# Altium PCB pcbEncoders.PcbDoc
Units mm, origin at the board's own origin, x right, y up, seen from the top; angles counter-clockwise.
Board outline 31.7 x 28.75 mm, 2 copper layers (Top Layer, Bottom Layer); 5 components, 47 nets, 26 pads, 0 vias.
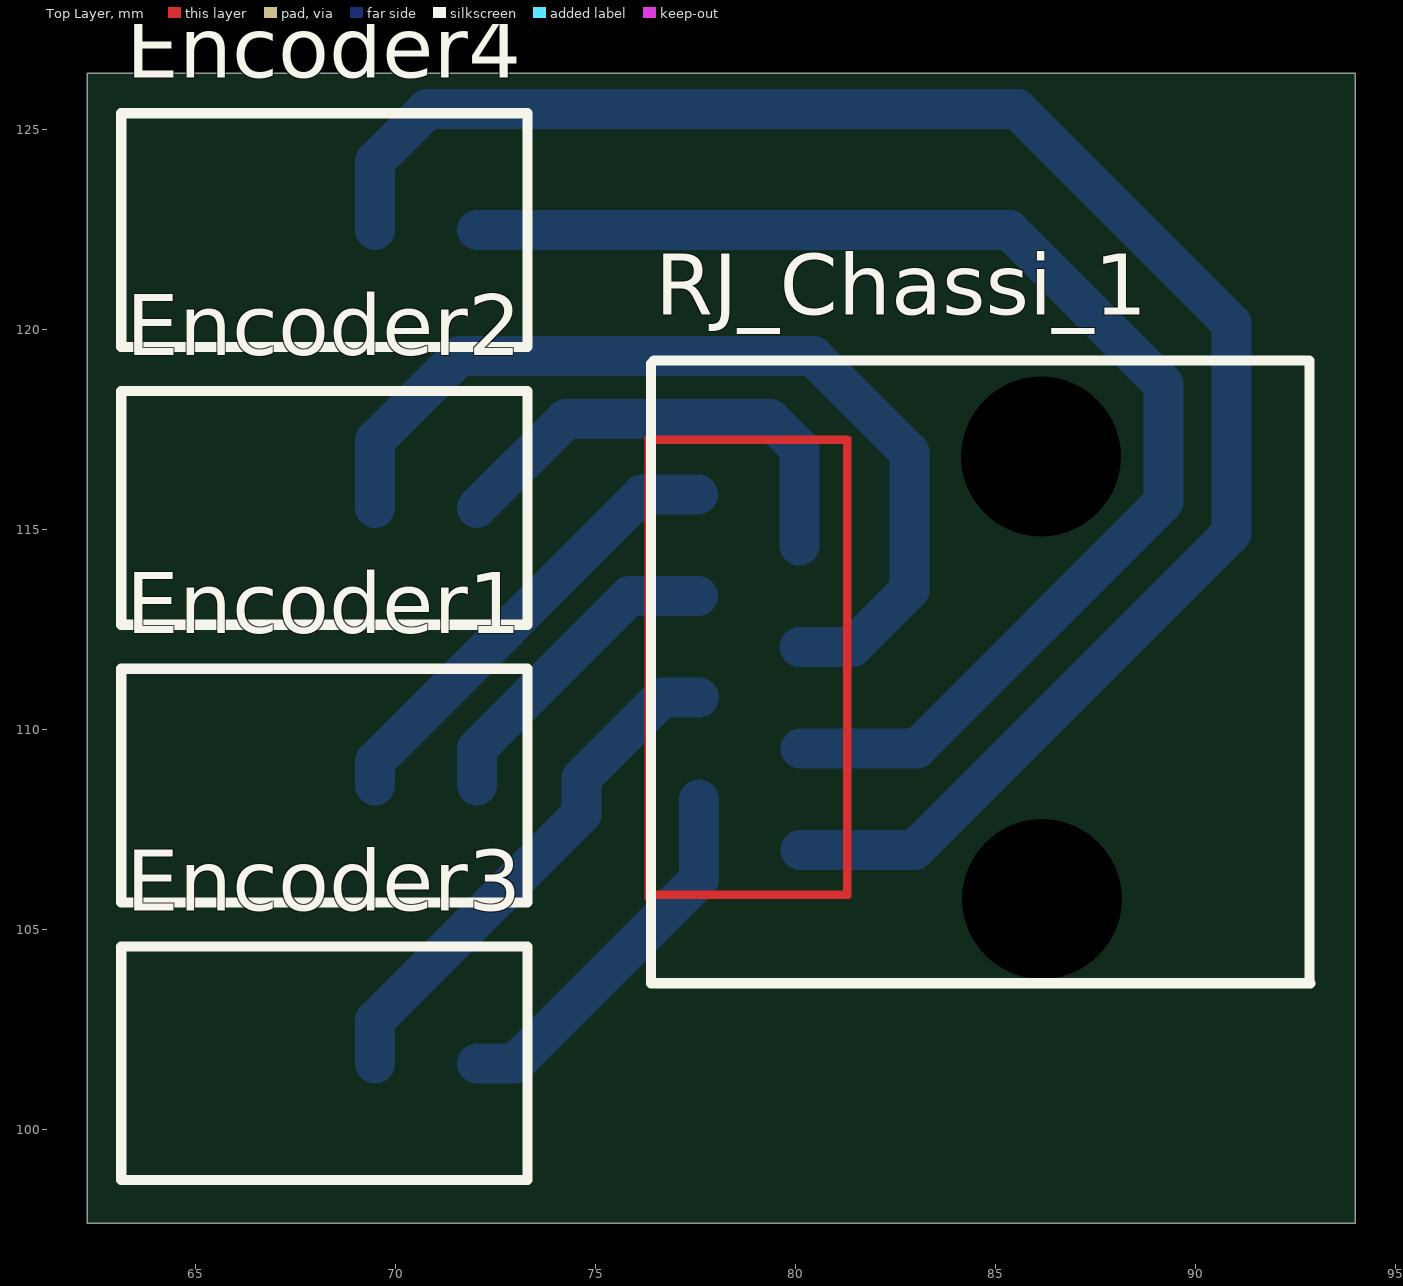
[diagram p0: Top Layer view]
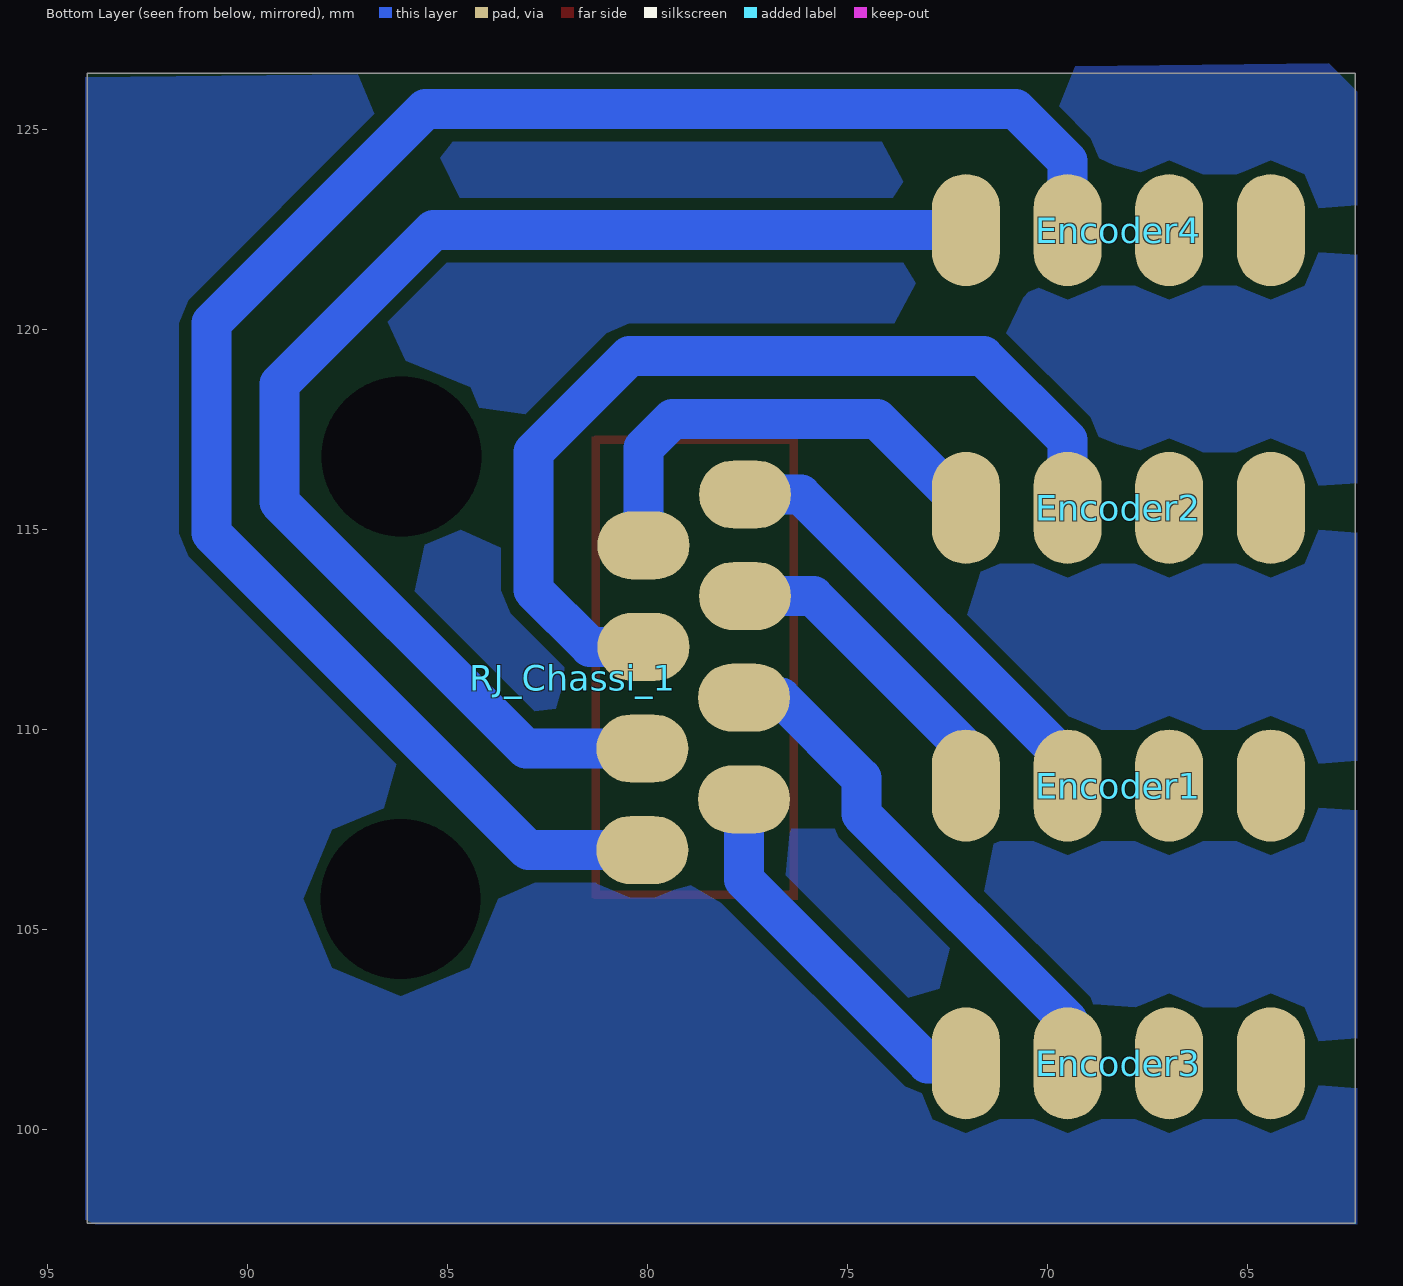
[diagram p1: Bottom Layer view, seen from below]
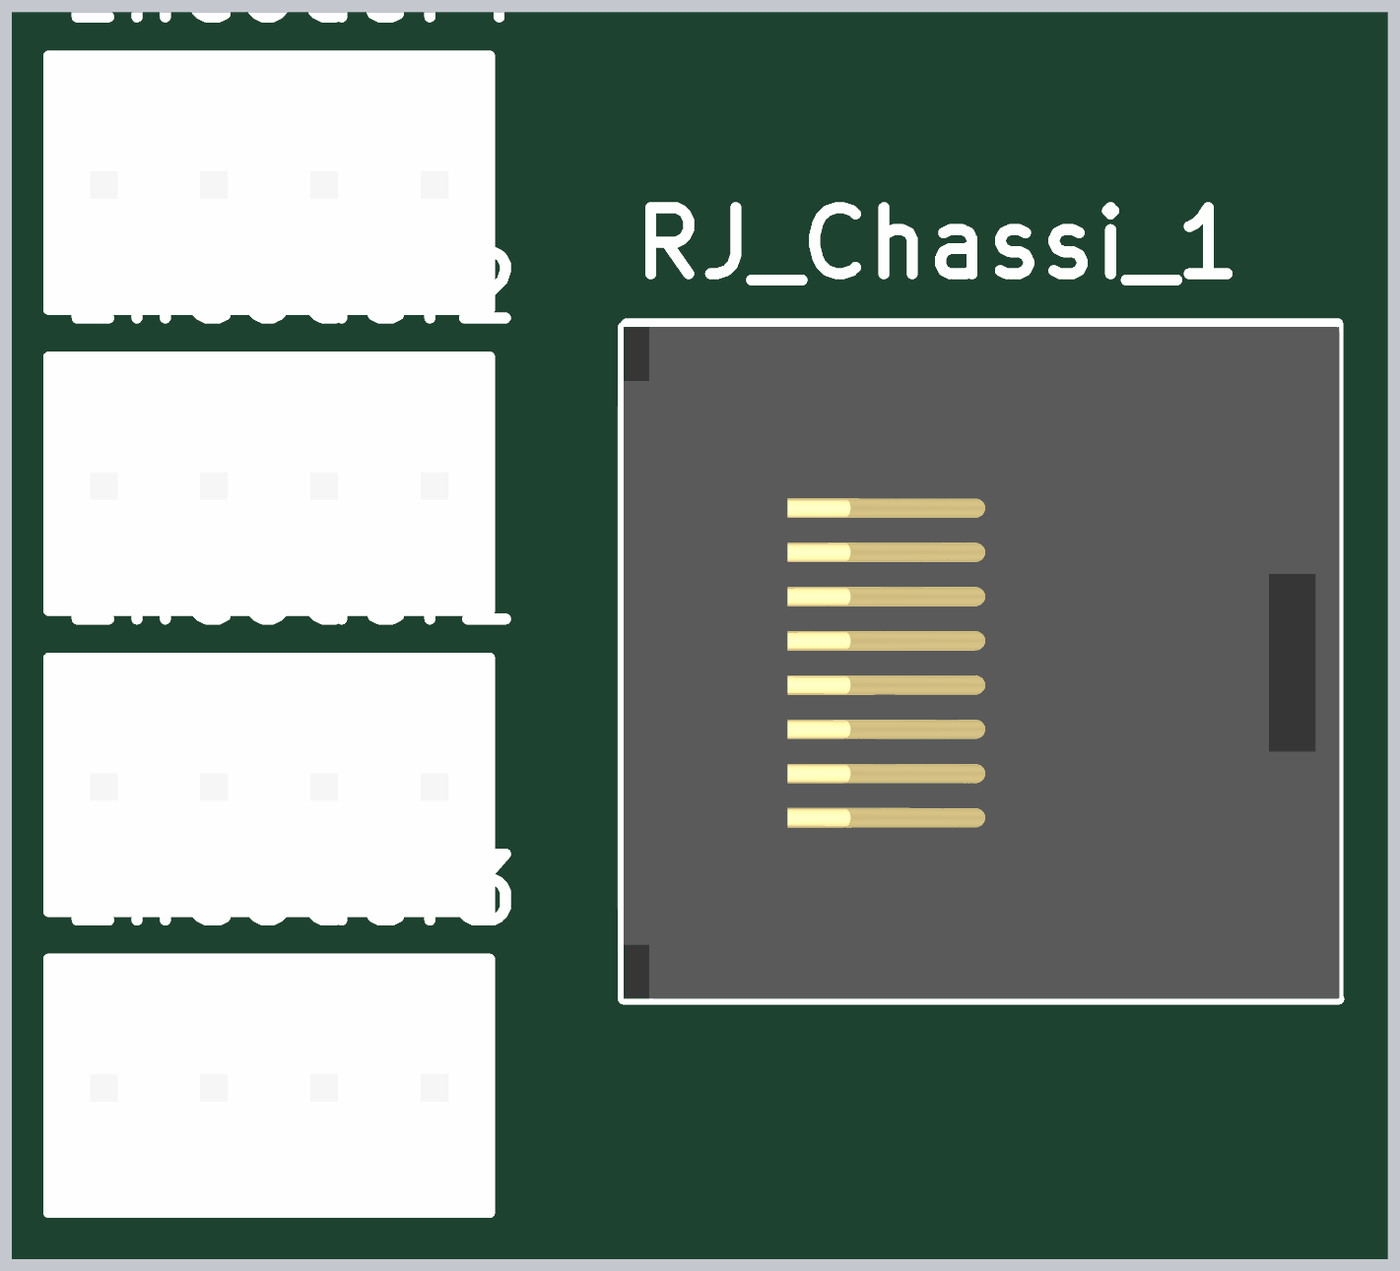
[diagram p2: 3D render of the assembled board from above, using the file's embedded part models]

## Layer stack, top to bottom
Top Solder: solder mask 0.0102, Solder Resist, Dk 3.5
Top Layer: signal copper 0.0356
Dielectric 1: dielectric 0.32, FR-4, Dk 4.8
Bottom Layer: signal copper 0.0356
Bottom Solder: solder mask 0.0102, Solder Resist, Dk 3.5

## Board outline
62.3,97.65 94,97.65 94,126.4 62.3,126.4

## Design rules (kind name [scope] priority, off if disabled: settings)
Clearance [All] p1: gap=0.254 ignorepadtopadclearanceinfootprint=FALSE except(0: Arc-Hole Track-Hole SMDPad-Hole THPad-Hole Via-Hole Fill-Hole Poly-Hole Region-Hole Text-Hole)
PlaneClearance [All] p1: clearance=2
PolygonConnect [All] p1: connectstyle=Relief reliefconductorwidth=0.254 reliefentries=4 polygonreliefangle="90 Angle" airgapwidth=0.254
RoutingVias [All] p1: holewidth=0.711 width=1.27 viastyle="Through Hole" minholewidth=0.711 minwidth=1.27 maxholewidth=0.711 maxwidth=1.27
SolderMaskExpansion [All] p1: expansion=0.102
Width [All] p1: maxlimit=2 minlimit=0.254 preferedwidth=1
29 further rules are at their usual default settings.

## Components (designator, comment, footprint, x,y, rotation, side; value= is the part's Value field where it differs from the comment)
Encoder1 "KK4" 4-vias 64.416,108.588 r90 top
Encoder2 "KK4" 4-vias 64.416,115.53 r90 top
Encoder3 "KK4" 4-vias 64.416,101.645 r90 top
Encoder4 "KK4" 4-vias 64.416,122.473 r90 top
RJ_Chassi_1 "RJ45" RJ45_90 89.218,116.119 r270 top

## Footprints (in the part's own frame and the unit in brackets; to place one, negate y for a bottom-side part, rotate by r counter-clockwise, add the part's x,y. Pads: shape width x height; smd on the part's side, far side on the other; paste and mask are expansions set on the pad)
4-vias [mm]
  oval 2.8x1.7 smd far side: 1(0,0) 2(0,-2.54) 3(0,-5.08) 4(0,-7.62)
  silkscreen extent -2.92,-8.89 2.92,1.27, body extent -2.92,-8.89 2.92,1.27, height 11.7
RJ45_90 [mil]
  oval 66.93x90.55 smd far side: 1(360,-358) 2(310,-458) 3(260,-358) 4(210,-458) 5(160,-359) 6(110,-459) 7(60,-359) 8(10,-459)
  round 60 hole 157.48: HOLE(-27.4,-121) HOLE(408.03,-120)
  Top Layer region: -47,-308.02 -47,-316 407,-316.01 407,-307.97
  Top Layer region: 400,-310 400,-509 408,-509 408,-310
  Top Layer region: -47,-503.03 -47,-511.01 409,-511.02 409,-502.98
  Top Layer region: -48,-311 -48,-510 -40,-510 -40,-311
  silkscreen extent -122,-505 491,144, body extent -119,-505 491,145, height 630

## Part data
Encoder1 Encoder2 Encoder3 Encoder4: library part KK4Vias, ComponentLink1Description=Fabricante, ComponentLink1URL=https://www.molex.com/molex/products/family?key=kk_254_rpc_connector_system&channel=products&chanName=family&pageTitle=Introduction&parentKey=kk_interconnect_solutions
RJ_Chassi_1: library part RJ45_90

## Nets (pads, with @x,y where several pads share a name; then routed paths per layer and width w, separated by ;. In a path a pad name is that pad's centre, name@x,y a point inside that pad or via, vN(x,y) a via of type N, cw(c..) or ccw(c..) an arc to the next point about the centre after c; other vN are vias at no path point)
1A: 
1B: 
2A: 
2B: 
3.3v: 
5V: 
12V: 
ChA_1: Encoder4.3 RJ_Chassi_1.1 | length 45.2
  Bottom Layer w1: Encoder4.3 69.496,124.2 70.796,125.5 85.55,125.5 90.9,120.15 90.9,114.9 82.975,106.975 RJ_Chassi_1.1
ChA_2: Encoder2.3 RJ_Chassi_1.5 | length 23.7
  Bottom Layer w1: Encoder2.3 69.496,117.221 71.6,119.325 80.45,119.325 82.85,116.925 82.85,113.475 81.43,112.055 RJ_Chassi_1.5
ChA_3: Encoder1.3 RJ_Chassi_1.8 | length 11.4
  Bottom Layer w1: Encoder1.3 69.496,109.196 76.165,115.865 RJ_Chassi_1.8
ChA_4: Encoder3.3 RJ_Chassi_1.4 | length 13
  Bottom Layer w1: Encoder3.3 69.496,102.721 74.65,107.875 74.65,108.775 76.66,110.785 RJ_Chassi_1.4
ChB_1: Encoder4.4 RJ_Chassi_1.3 | length 33.3
  Bottom Layer w1: Encoder4.4 85.352,122.473 89.2,118.625 89.2,115.675 83.04,109.515 RJ_Chassi_1.3
ChB_2: Encoder2.4 RJ_Chassi_1.7 | length 11.7
  Bottom Layer w1: Encoder2.4 74.256,117.75 79.375,117.75 80.1,117.025 RJ_Chassi_1.7
ChB_3: Encoder1.4 RJ_Chassi_1.6 | length 8
  Bottom Layer w1: Encoder1.4 72.036,109.511 75.85,113.325 RJ_Chassi_1.6
ChB_4: Encoder3.4 RJ_Chassi_1.2 | length 9.5
  Bottom Layer w1: Encoder3.4 72.995,101.645 77.585,106.235 RJ_Chassi_1.2
CLK_1: 
CLK_2: 
DIR: 
EN: 
GND: 
MISO_2: 
MOSI_1: 
MOSI_2: 
MotA_1: 
MotA_2: 
MotB_1: 
MotB_2: 
MotC_1: 
MotC_2: 
MotD_1: 
MotD_2: 
MS1: 
MS2: 
MS3: 
NetC2_1: 
NetConv_3V_4: 
NetConv_5V_2: 
NetConv_5V_3: 
RST: 
Servo1: 
Servo2: 
Servo3: 
Servo4: 
SLP: 
SS_1: 
SS_2: 
STP: 
pads on no net: Encoder1.1 Encoder1.2 Encoder2.1 Encoder2.2 Encoder3.1 Encoder3.2 Encoder4.1 Encoder4.2 RJ_Chassi_1.HOLE

## Polygon pours and split planes (outlines as drawn)
no net on Bottom Layer "GND_L01_P-001" (solid, pour order 2): 62.25,126.65 62.25,97.625 93.8,97.625 94.05,97.375 94.05,126.3